# EAGLE board 110719027,110719040,第14組 (EAGLE 7.6.0)

Size 73.58 x 76.09 mm. Coordinates in mm from the lower left corner, seen from the top.
Outline: 0,0 56.82,0 56.82,53.33 0,53.33 0,0
Copper layers (1*16): Top 0.035mm / dielectric 1.5mm / Bottom 0.035mm
Design rules "default": minimum track width 10mil, minimum drill 24mil, track to track 8mil, track to pad 8mil, pad to pad 8mil, via to via 8mil, smd to smd 8mil, copper to edge 40mil, drill to drill 8mil, minimum pad ring 10mil, minimum via ring 8mil, stop-mask expansion 4mil, vias tented up to drill 0mil, thermal gap 10mil

## Footprints (pad centres in the part's own frame; a part is rotated, then mirrored left to right if it is on the bottom)
LED5MM = drill 0.813 octagon: A -1.27,0; K 1.27,0
0207/10 = drill 0.813 octagon: 1 -5.08,0; 2 5.08,0
DIP04YL = drill 0.813 long: 1 -3.81,-3.81; 2 -1.27,-3.81; 3 1.27,-3.81; 4 3.81,-3.81; 5 3.81,3.81; 6 1.27,3.81; 7 -1.27,3.81; 8 -3.81,3.81
ARDUINO_UNO = drill 1.016 pad 1.88: 0 63.5,50.8; 1 60.96,50.8; 2 58.42,50.8; 3 55.88,50.8; 3.3V 35.56,2.54; 4 53.34,50.8; 5 50.8,50.8; 5V 38.1,2.54; 6 48.26,50.8; 7 45.72,50.8; 8 41.656,50.8; 9 39.116,50.8; 10 36.576,50.8; 11 34.036,50.8; 12 31.496,50.8; 13 28.956,50.8; A0 50.8,2.54; A1 53.34,2.54; A2 55.88,2.54; A3 58.42,2.54; A4 60.96,2.54; A5 63.5,2.54; AREF 23.876,50.8; GND 26.416,50.8; GND. 43.18,2.54; GND.. 40.64,2.54; I/OREF 30.48,2.54; N/C 27.94,2.54; RESET 33.02,2.54; SCL 18.796,50.8; SDA 21.336,50.8; VIN 45.72,2.54 | hole 3.2: 66.04,7.62; 66.04,35.56; 15.24,50.8; 13.97,2.54
DIL14 = drill 0.813 long: 1 -7.62,-3.81; 2 -5.08,-3.81; 3 -2.54,-3.81; 4 0,-3.81; 5 2.54,-3.81; 6 5.08,-3.81; 7 7.62,-3.81; 8 7.62,3.81; 9 5.08,3.81; 10 2.54,3.81; 11 0,3.81; 12 -2.54,3.81; 13 -5.08,3.81; 14 -7.62,3.81

## Placement (x,y rotation side)
D3  [LED5MM]  5,86.28 0 top  (outside the outline)
D5  [LED5MM]  5,111.68 0 top  (outside the outline)
R5  1k‎Ω  [0207/10]  5,73.58 0 top
R7  1k‎Ω  [0207/10]  5,98.98 0 top  (outside the outline)
SW2  [DIP04YL]  5,10.08 0 top
U1  [ARDUINO_UNO]  5,22.78 0 top
U3  [DIL14]  5,35.48 0 top
U5  [DIL14]  5,48.18 0 top
U7  [DIL14]  5,60.88 0 top

## Library data of the parts
D3 D5 R5 R7 SW2 U1 U3 U5 U7 = AUTODESK_CIRCUITS_BREADBOARD

## Nets
N$1: SW2.5 SW2.8 U3.1 U5.2
N$2: SW2.6
N$3: SW2.7 U3.13
N$4: U3.3 U3.12
N$5: U5.10
N$6: U5.8
N$7: U5.12
N$8: U5.9
N$9: D3.K D5.K SW2.1 SW2.2 SW2.3 SW2.4 U1.GND U3.7 U5.3 U5.7 U5.13 U7.7
N$10: U3.4 U5.1
N$11: U3.9
N$12: U3.6
N$13: U3.8
N$14: U3.10
N$15: U3.5
N$16: U3.2 U3.11 U7.3
N$17: U7.13
N$18: U7.9
N$19: U7.12
N$20: U7.5
N$21: U7.8
N$22: U7.10
N$23: R5.2 U5.11 U7.2
N$24: R7.2 U1.5V U3.14 U5.14 U7.1 U7.4 U7.6 U7.14
N$25: U7.11
N$26: U5.6
N$27: U5.5
N$28: D3.A R5.1 U5.4
N$29: D5.A R7.1

## Tracks (layer width: path | path; a pad name or v marks a point on that pad's centre or on a via)
N$1  (3 unrouted)
N$3  (1 unrouted)
N$4  (1 unrouted)
N$9  (11 unrouted)
N$10  (1 unrouted)
N$16  (2 unrouted)
N$23  (2 unrouted)
N$24  (7 unrouted)
N$28  (2 unrouted)
N$29  (1 unrouted)